# Altium PCB TX_Board.PcbDoc (part 1 of 5)
Units mm, origin at the board's own origin, x right, y up, seen from the top; angles counter-clockwise.
Board outline 69 x 69 mm, 4 copper layers (Top Layer, Int1 (GND), Int2 (GND), Bottom Layer), stack 1.591 mm thick; 102 components, 48 nets, 289 pads, 82 vias.
Unrouted connection lines stored in the file: 40.
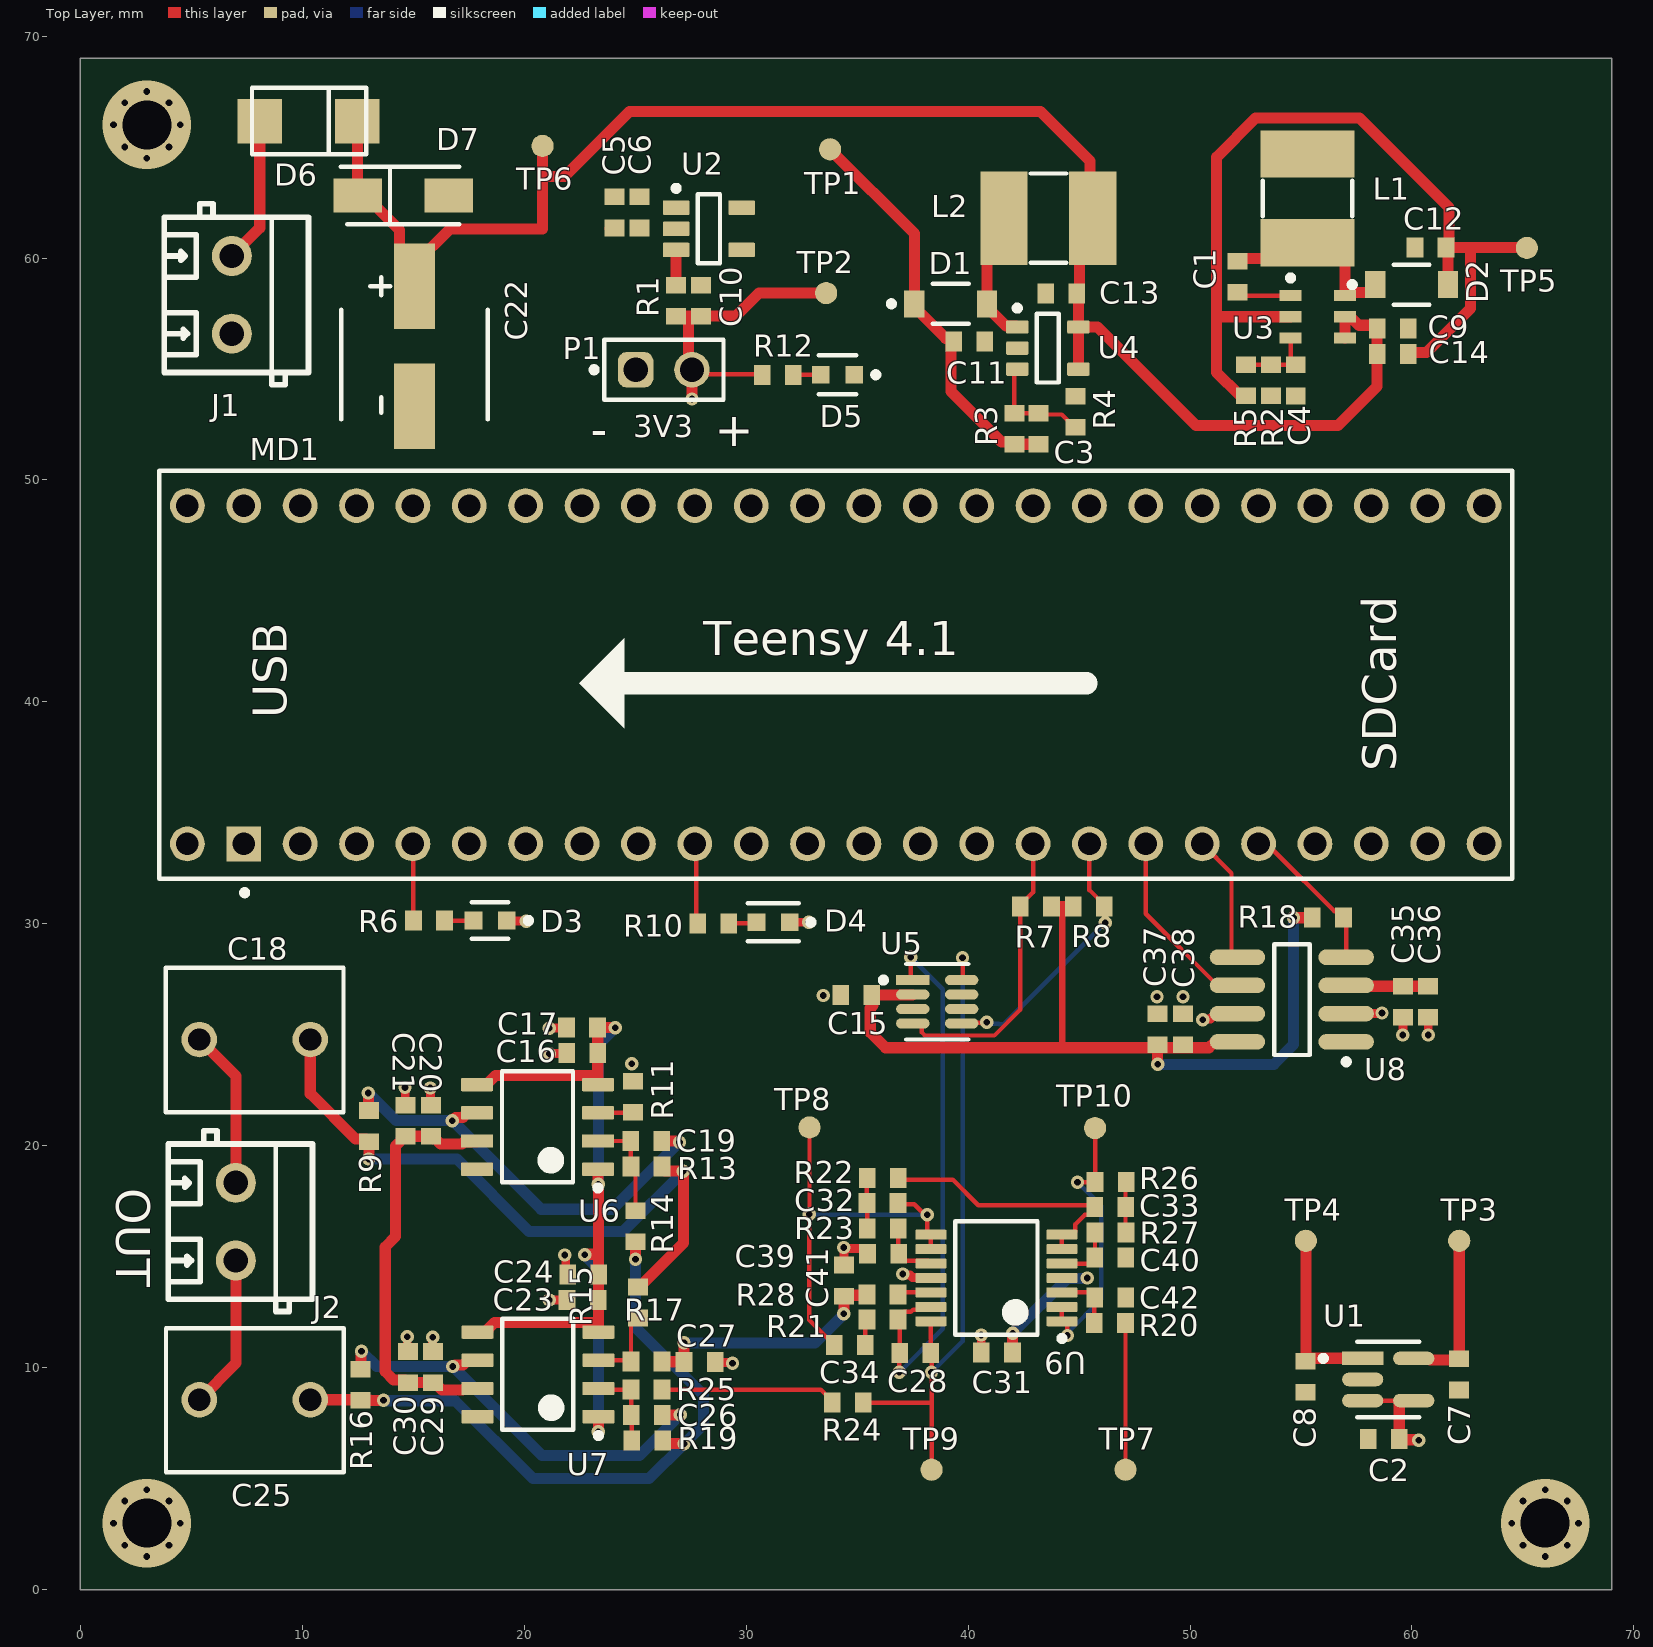
[diagram p0: Top Layer view]
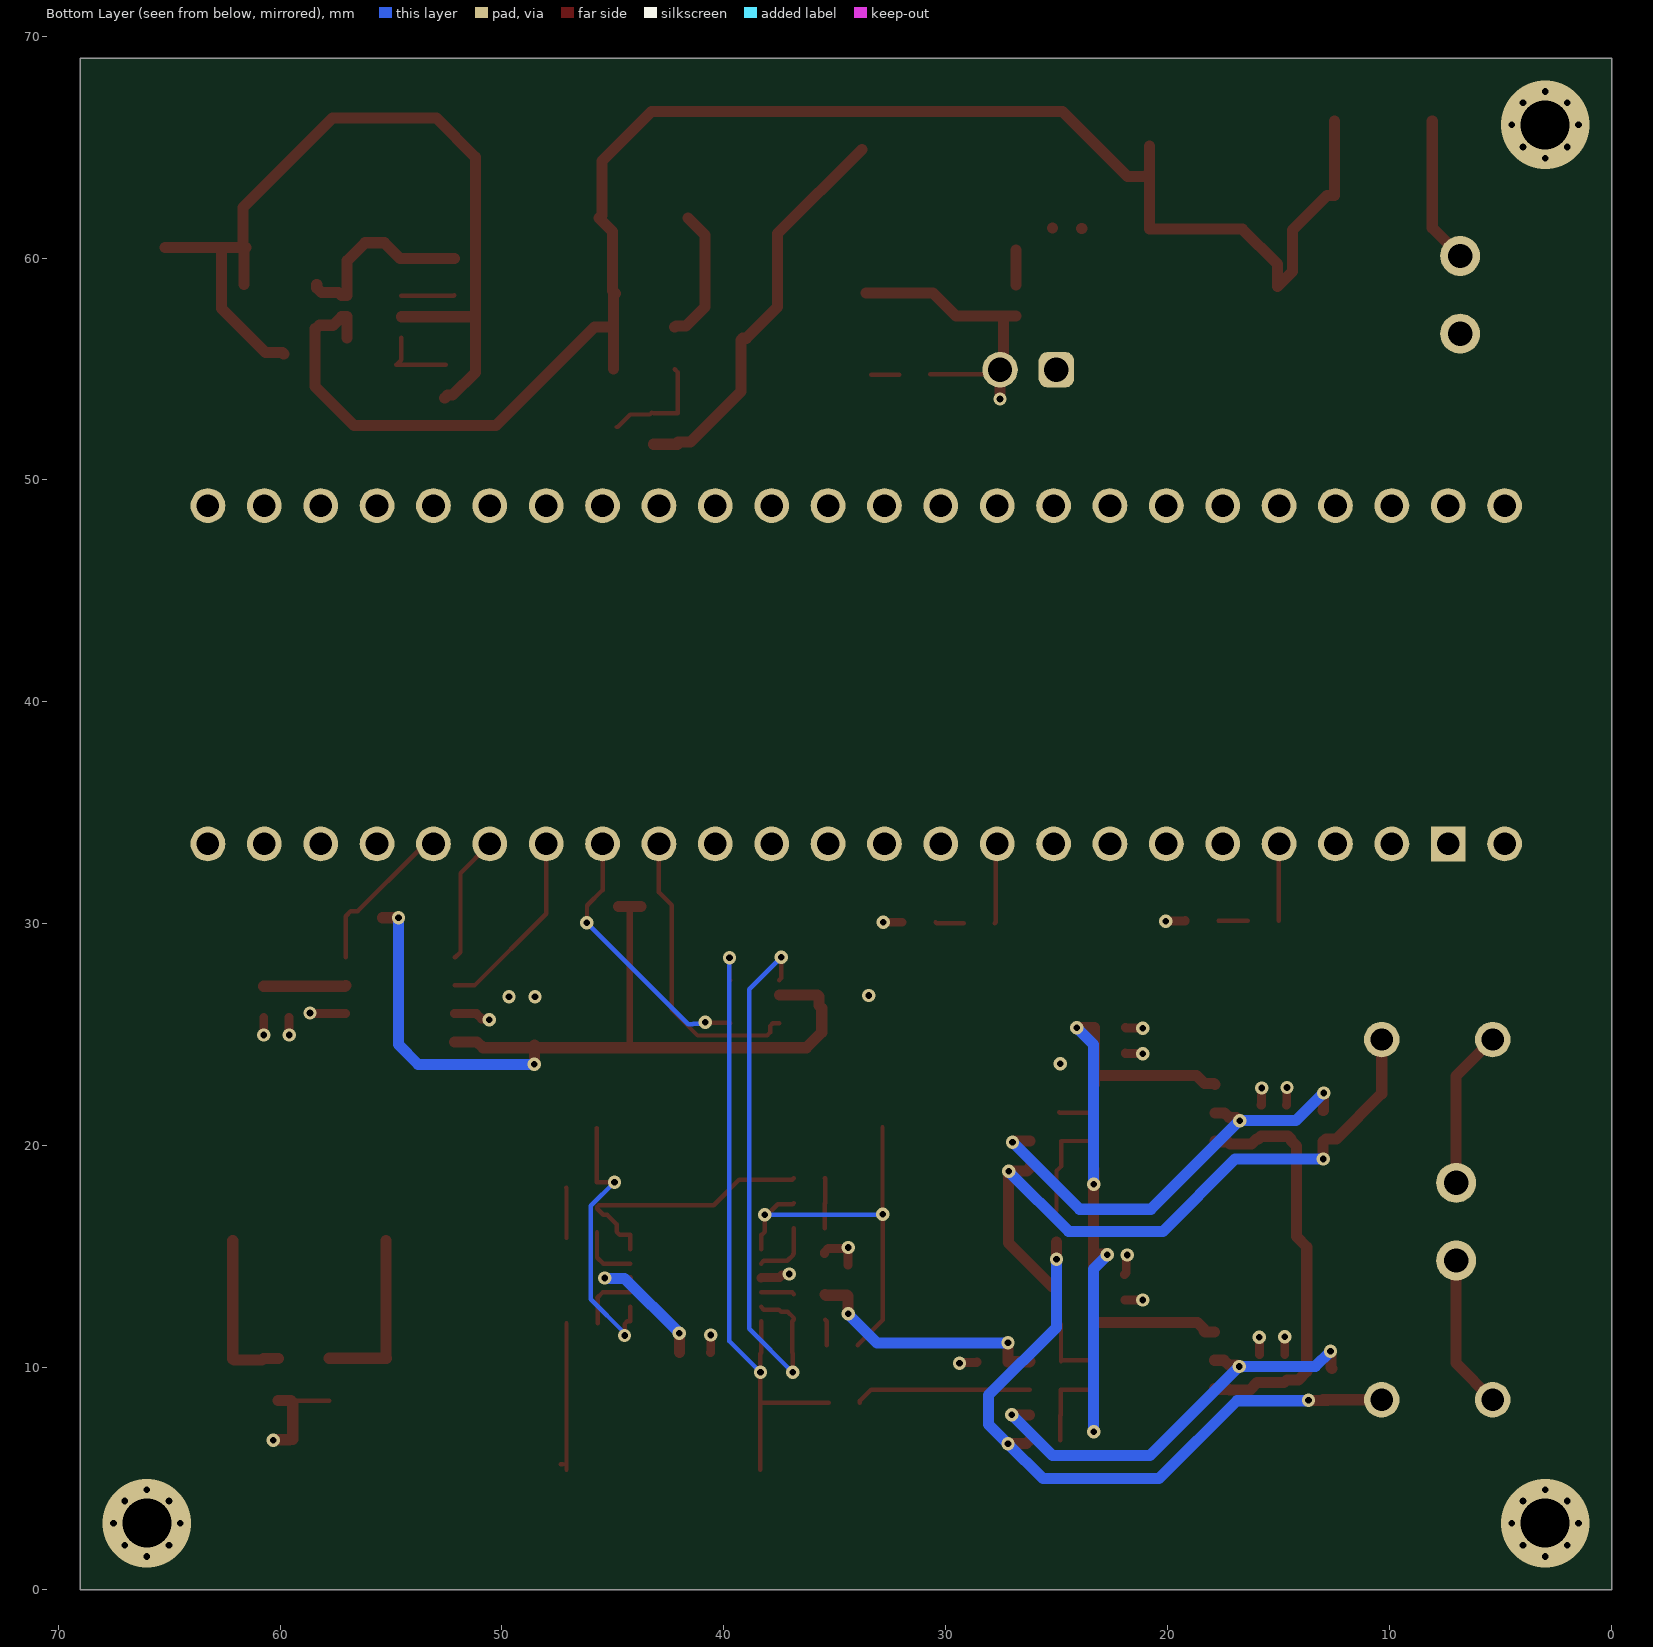
[diagram p1: Bottom Layer view, seen from below]
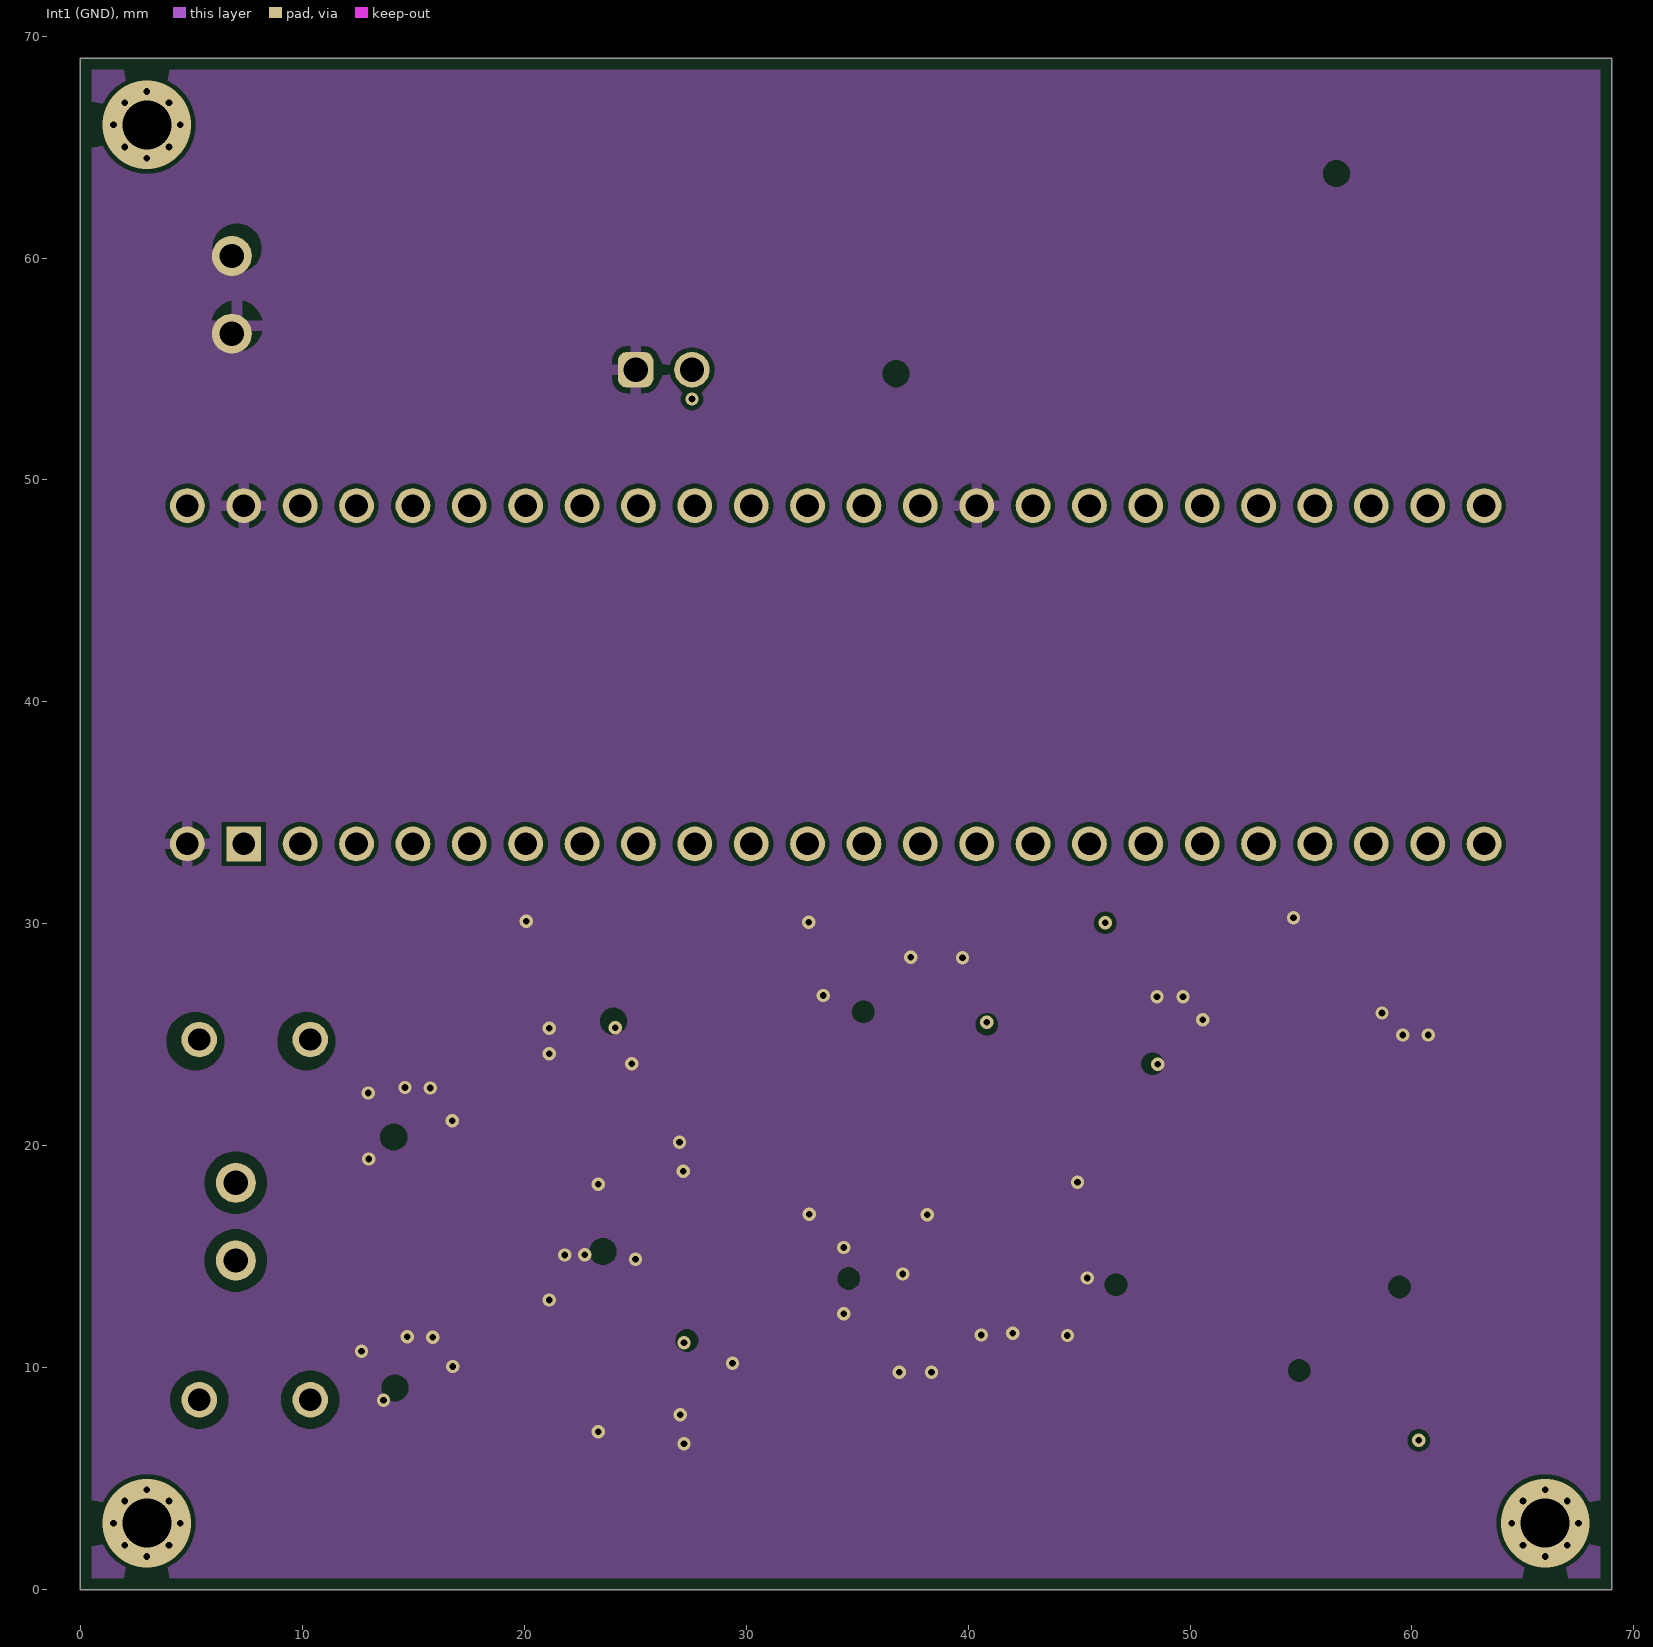
[diagram p2: Int1 (GND)]
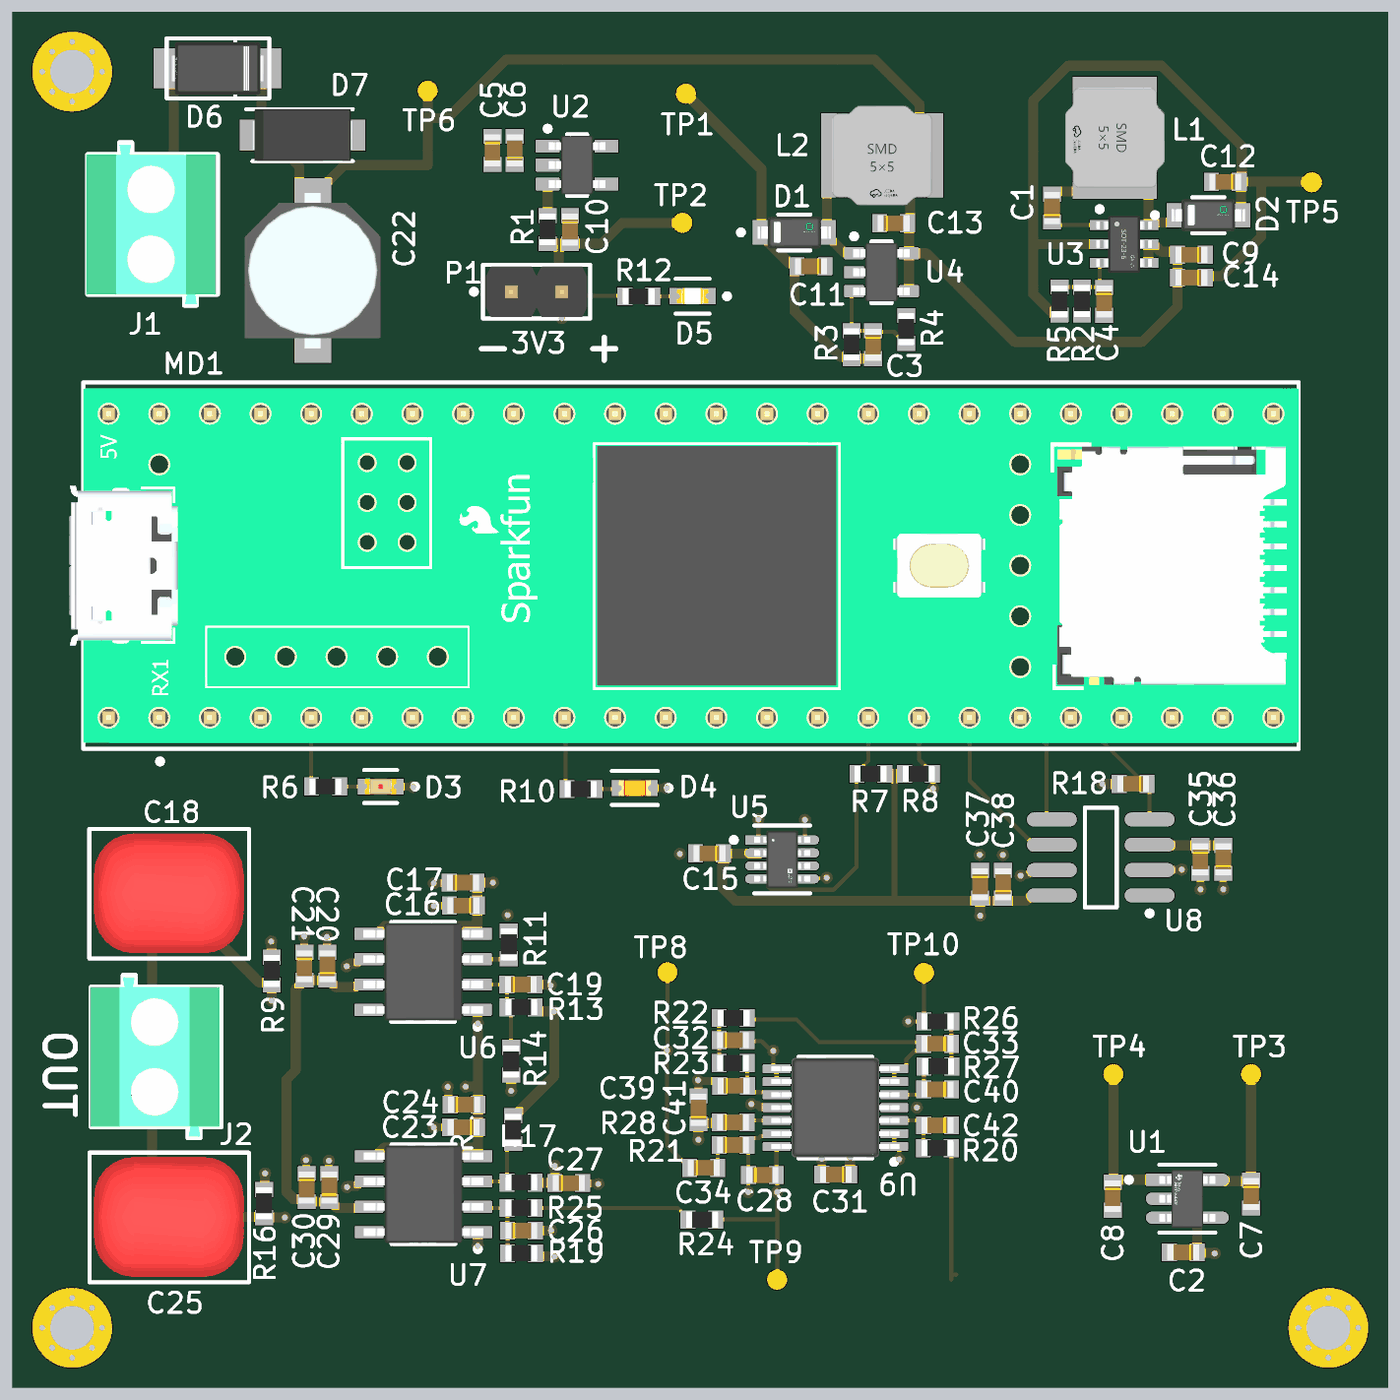
[diagram p3: 3D render of the assembled board from above, using the file's embedded part models]

## Layer stack, top to bottom
Top Solder: solder mask 0.0254, SM-001, Dk 4
Top Layer: signal copper 0.035
Dielectric 1: prepreg 0.2104, PP-017, Dk 4.4
Int1 (GND): signal copper 0.0175
Dielectric 3: core 1.065, Core-039, Dk 4.6
Int2 (GND): signal copper 0.0175
Dielectric 5: prepreg 0.2104, PP-017, Dk 4.4
Bottom Layer: signal copper 0.035
Bottom Solder: solder mask 0.0254, SM-001, Dk 4

## Board outline
0,0 0,69 69,69 69,0

## Design rules (kind name [scope] priority, off if disabled: settings)
BoardOutlineClearance [All] p1: gap=0.5 ignorepadtopadclearanceinfootprint=FALSE
Clearance Clearance_HYD [InNetClass('HYD')] p1: gap=0.5 ignorepadtopadclearanceinfootprint=FALSE
Clearance Clearance_HV [InNetClass('HV')] p2: gap=0.3 ignorepadtopadclearanceinfootprint=FALSE
Clearance Clearance_PWR_MAIN [InNetClass('PWR_MAIN')] p3: gap=0.2 ignorepadtopadclearanceinfootprint=FALSE
Clearance Clearance_PWR_LV [InNetClass('PWR_LV')] p4: gap=0.2 ignorepadtopadclearanceinfootprint=FALSE
Clearance [All] p5: gap=0.2 ignorepadtopadclearanceinfootprint=FALSE
MinimumSolderMaskSliver [All] p1: minsoldermaskwidth=0.1
PolygonConnect [All] p1: thpad.connectstyle=Relief thpad.reliefconductorwidth=0.5 thpad.reliefentries=4 thpad.polygonreliefangle="90 Angle" thpad.airgapwidth=0.254 smdpad.connectstyle=Direct smdpad.reliefconductorwidth=0.254 smdpad.reliefentries=4 smdpad.polygonreliefangle="90 Angle" smdpad.airgapwidth=0.254 via.connectstyle=Direct via.reliefconductorwidth=0.254 via.reliefentries=4 via.polygonreliefangle="90 Angle" via.airgapwidth=0.254
RoutingVias [All] p1: holewidth=0.3 width=0.6 viastyle="Through Hole" minholewidth=0.3 minwidth=0.6 maxholewidth=0.3 maxwidth=0.6
SilkToSilkClearance [All] p1: silktosilkclearance=0.15
SolderMaskExpansion SolderMaskExpansion_Vias [IsVia] p1: expansion=0.102 istentingtop=TRUE
SolderMaskExpansion SolderMaskExpansion_THT [IsPad And IsThruPin] p2: expansion=0.1 istentingtop=FALSE
SolderMaskExpansion [All] p3: expansion=0.05 istentingtop=FALSE
SupplyNets "Schematic Supply Nets_4" [InNet('VDD')] p1: voltage=0.000
SupplyNets "Schematic Supply Nets_3" [InNet('VSS')] p2: voltage=0.000
SupplyNets "Schematic Supply Nets_2" [InNet('VIN')] p3: voltage=0.000
SupplyNets "Schematic Supply Nets_1" [InNet('+3V3')] p4: voltage=0.000
SupplyNets "Schematic Supply Nets" [InNet('GND')] p5: voltage=0.000
Width Width_HYD [InNetClass('HYD')] p1: maxlimit=0.8 minlimit=0.5 preferedwidth=0.5
Width Width_GND [InNet('GND')] p2: maxlimit=0.8 minlimit=0.4 preferedwidth=0.5
Width Width_HV [InNetClass('HV')] p3: maxlimit=0.5 minlimit=0.5 preferedwidth=0.5
Width Width_PWR_MAIN [InNetClass('PWR_MAIN')] p4: maxlimit=0.8 minlimit=0.5 preferedwidth=0.5
Width Width_PWR_LV [InNetClass('PWR_LV')] p5: maxlimit=0.5 minlimit=0.5 preferedwidth=0.5
Width [All] p6: maxlimit=0.2 minlimit=0.15 preferedwidth=0.2
28 further rules are at their usual default settings.

## Classes and differential pairs
net class HYD: AMP_A AMP_A_OUT AMP_B AMP_B_OUT HYD_N HYD_P
net class PWR_LV: 3V3_LDO +3V3 REF_1V5 REF_3V
net class PWR_MAIN: VIN VIN_Supply
net class HV: Boost_SW IBuck_SW VDD VSS

## Components (designator, comment, footprint, x,y, rotation, side; value= is the part's Value field where it differs from the comment)
C1 "100nF" CAP_0603 52.146,59.157 r90 top
C2 "100nF" CAP_0603 58.727,6.782 r180 top
C3 "150pF" CAP_0603 43.169,52.31 r270 top
C4 "150pF" CAP_0603 54.762,54.483 r270 top
C5 "10uF" CAP_0603 24.079,62.052 r270 top value=10µF
C6 "100nF" CAP_0603 25.197,62.052 r90 top
C7 "100nF" CAP_0603 62.128,9.703 r270 top
C8 "100nF" CAP_0603 55.194,9.601 r270 top
C9 "4.7µF" CAP_0603 59.131,56.82 r180 top
C10 "1µF" CAP_0603 27.965,58.079 r270 top
C11 "10uF 35V" CAP_0603 40.056,56.236 r180 top value=10µF
C12 "10uF 35V" CAP_0603 60.833,60.477 r180 top value=10µF
C13 "4.7µF" CAP_0603 44.196,58.395 r0 top
C14 "10uF 50V" CAP_0603 59.131,55.677 r180 top value=10µF
C15 "100nF" CAP_0603 34.963,26.797 r180 top
C16 "100nF" CAP_0603 22.617,24.181 r180 top
C17 "10uF 35V" CAP_0603 22.606,25.324 r0 top value=10µF
C18 "1uF Film" PE105J2A0502 10.363,24.79 r180 top value=1uF
C19 "10pF" CAP_0603 25.502,20.218 r0 top
C20 "100nF" CAP_0603 15.799,21.133 r90 top
C21 "10uF 35V" CAP_0603 14.656,21.133 r270 top value=10µF
C22 "100uF 25V" CAPAE660X800N 15.062,56.025 r270 top value=100uF
C23 "100nF" CAP_0603 22.631,13.056 r180 top
C24 "10uF 35V" CAP_0603 22.657,14.199 r0 top value=10µF
C25 "1uF Film" PE105J2A0502 10.365,8.56 r180 top value=1uF
C26 "4.7pF" CAP_0603 25.527,7.874 r0 top
C27 "100nF" CAP_0603 27.903,10.262 r0 top
C28 "10pF" CAP_0603 37.617,10.668 r0 top
C29 "100nF" CAP_0603 15.9,10.033 r90 top
C30 "10uF 35V" CAP_0603 14.757,10.033 r270 top value=10µF
C31 "100nF" CAP_0603 41.3,10.693 r180 top
C32 "470pF" CAP_0603 36.144,17.424 r0 top
C33 "470pF" CAP_0603 46.406,17.247 r180 top
C34 "10nF" CAP_0603 34.671,11.024 r0 top
C35 "100nF" CAP_0603 59.588,26.492 r270 top
C36 "4.7µF" CAP_0603 60.731,26.492 r90 top
C37 "10uF" CAP_0603 48.539,25.248 r270 top value=10µF
C38 "100nF" CAP_0603 49.684,25.248 r90 top
C39 "47pF" CAP_0603 36.17,15.138 r0 top
C40 "47pF" CAP_0603 46.406,14.961 r180 top
C41 "100nF" CAP_0603 34.417,13.93 r90 top
C42 "47pF" CAP_0603 46.406,13.157 r180 top
D1 "MBR0540" FP-425-04-MFG 39.218,57.937 r0 top
D2 "MBR0540" FP-425-04-MFG 59.982,58.801 r0 top
D3 "LTST-C190KRKT" FP-LTST-C190KRKT-MFG 18.468,30.15 r180 top
D4 "LTST-C190KFKT" FP-LTST-C190KFKT-MFG 31.218,30.074 r180 top
D5 "LTST-C190KGKT" FP-LTST-C190KGKT-MFG 34.117,54.74 r180 top
D6 "SS34" SS34 10.287,66.167 r0 top
D7 "SMAJ15A" DIOM5026X229N 14.554,62.814 r0 top
J1 "DB301V-3.5-2P-GN-S" DB301V-3.5-2P-GN-S 6.833,60.091 r270 top
J2 "DB301V-3.5-2P-GN-S" DB301V-3.5-2P-GN-S 7.012,18.334 r270 top
L1 "22µH" SWPA5040S100MT 55.296,62.687 r90 top
L2 "10µH" SWPA5040S100MT 43.618,61.798 r180 top
MD1 "DEV-16996" FP-DEV-16996-MFG 34.038,41.224 r0 top locked
P1 "61300211121" 61300211121 26.291,54.966 r0 top
R1 "0Ω" RES_0603 26.846,58.093 r270 top
R2 "309K" RES_0603 53.645,54.502 r270 top value=309kΩ
R3 "205K" RES_0603 42.088,52.324 r270 top value=205kΩ
R4 "12K" RES_0603 44.831,53.086 r270 top value=12kΩ
R5 "11K" RES_0603 52.527,54.483 r90 top value=11kΩ
R6 "1kΩ" RES_0603 15.699,30.15 r0 top
R7 "4.7kΩ" RES_0603 43.044,30.785 r0 top
R8 "4.7kΩ" RES_0603 45.457,30.785 r180 top
R9 "0Ω" RES_0603 13.005,20.904 r270 top
R10 "1kΩ" RES_0603 28.501,30.023 r0 top
R11 "15kΩ" RES_0603 24.892,22.225 r270 top
R12 "1kΩ" RES_0603 31.407,54.737 r0 top
R13 "33kΩ" RES_0603 25.527,19.075 r180 top
R14 "33kΩ" RES_0603 25.019,16.358 r90 top
R15 "68kΩ" RES_0603 25.121,12.929 r90 top
R16 "0Ω" RES_0603 12.624,9.246 r270 top
R17 "2.49kΩ" RES_0603 25.527,10.287 r180 top
R18 "10kΩ" CAP_0603 56.212,30.277 r180 top
R19 "68kΩ" RES_0603 25.527,6.731 r0 top
R20 "0Ω" RES_0603 46.406,12.016 r180 top
R21 "10kΩ" CAP_0603 36.144,12.167 r0 top
R22 "1.2kΩ" RES_0603 36.169,18.544 r180 top
R23 "15kΩ" RES_0603 36.144,16.281 r0 top
R24 "0Ω" RES_0603 34.595,8.433 r180 top
R25 "2.49kΩ" RES_0603 25.527,9.017 r180 top
R26 "820R" RES_0603 46.406,18.364 r0 top value=820Ω
R27 "27kΩ" RES_0603 46.431,16.104 r180 top
R28 "10kΩ" CAP_0603 36.144,13.31 r0 top
TP1 "Test Point" "Test Point"#1 33.782,64.897 r90 top
TP2 "Test Point" "Test Point"#1 33.604,58.42 r270 top
TP3 "Test Point" "Test Point"#1 62.128,15.723 r90 top
TP4 "Test Point" "Test Point"#1 55.22,15.723 r90 top
TP5 "Test Point" "Test Point"#1 65.176,60.452 r90 top
TP6 "Test Point" "Test Point"#1 20.828,65.049 r90 top
TP7 "Test Point" "Test Point"#2 247.092,2.512 r90 top
TP8 "Test Point" "Test Point"#1 32.856,20.828 r270 top
TP9 "Test Point" "Test Point"#1 38.354,5.41 r90 top
TP10 "Test Point" "Test Point"#1 45.72,20.803 r270 top
U1 "REF2030AIDDCR" FP-DDC0005A-IPC_A 58.93,9.474 r0 top
U2 "TLV70433DBVR" DBV0005A_M 28.323,61.316 r0 top
U3 "LMR16006" LMR16006YDDCR 55.755,57.353 r0 top
U4 "LMR64010XMFX/NOPB" DBV0005A_N 43.592,55.941 r0 top
U5 "AD5245BRJZ10-RL7" FP-RJ-8-IPC_B 38.61,26.492 r0 top
U6 "OPA551UA/2K5" D0008A_N 20.601,20.853 r180 top
U7 "OPA552UA/2K5" D0008A_N 20.619,9.703 r180 top
U8 "DAC8830ICDR" TI-D8_M 54.586,26.591 r180 top
U9 "OPA4322AIPWR" PW0014A_N 41.277,14.046 r180 top

## Footprints (in the part's own frame and the unit in brackets; to place one, negate y for a bottom-side part, rotate by r counter-clockwise, add the part's x,y. Pads: shape width x height; smd on the part's side, far side on the other; paste and mask are expansions set on the pad)
61300211121 [mm] "Pin Header, pitch 2.54 mm, THT, Vertical, single row, 2p"
  rrect50% 1.6x1.6 hole 1.1: 1(-1.27,0)
  round 1.6 hole 1.1: 2(1.27,0)
  silkscreen extent -3.26,-1.35 2.69,1.35, body extent -2.54,-1.27 2.54,1.27, height 8.57
CAP_0603 [mm]
  rect 0.75x0.9 smd: 1(-0.7,0) 2(0.7,0)
  body extent -0.8,-0.4 0.8,0.4, height 0.9
CAPAE660X800N [mm]
  rect 3.85x1.85 smd: 1(-2.7,0) 2(2.7,0)
  silkscreen extent -3.1,-3.3 3.3,3.3, body extent -3.9,-3.4 3.9,3.4, height 8
D0008A_N [mm] "SOIC, 8-Leads, Body 5x4mm, Pitch 1.27mm, IPC Medium Density"
  rrect17% 1.45x0.6 smd: 1(-2.725,1.905) 2(-2.725,0.635) 3(-2.725,-0.635) 4(-2.725,-1.905) 5(2.725,-1.905) 6(2.725,-0.635) 7(2.725,0.635) 8(2.725,1.905)
  silkscreen extent -2.85,-2.5 1.6,2.88, body extent -3,-2.45 3,2.45, height 1.63
DB301V-3.5-2P-GN-S [mm]
  round 1.8 hole 1.1: 1(0,0) 2(3.5,0)
  silkscreen extent -2.35,-3.05 5.8,3.45, body extent -2.25,-3.13 5.75,3.38, height 8.5
DBV0005A_M [mm] "SOT23, 5-Leads, Body 3.05x1.75mm, Pitch 0.95mm, IPC Low Density"
  rrect15% 1.2x0.65 smd: 1(-1.475,0.95) 2(-1.475,0) 3(-1.475,-0.95) 4(1.475,-0.95) 5(1.475,0.95)
  silkscreen extent -1.6,-1.55 0.5,1.95, body extent -1.42,-1.46 1.42,1.46, height 1.08
DBV0005A_N [mm] "SOT23, 5-Leads, Body 3.05x1.75mm, Pitch 0.95mm, IPC Medium Density"
  rrect17% 1x0.6 smd: 1(-1.375,0.95) 2(-1.375,0) 3(-1.375,-0.95) 4(1.375,-0.95) 5(1.375,0.95)
  silkscreen extent -1.5,-1.55 0.5,1.92, body extent -1.42,-1.46 1.42,1.46, height 1.08
DIOM5026X229N [mm]
  rect 2.2x1.55 smd: 1(-2.05,0) 2(2.05,0)
  silkscreen extent -2.83,-1.3 2.52,1.3, body extent -2.52,-1.3 2.52,1.3, height 2.29
FP-425-04-MFG [mil]
  rect 36x48 smd paste+0: 1(-64.5,0) 2(64.5,0)
  silkscreen extent -110,-35 32,35, body extent -86,-39 86,39, height 10
FP-DDC0005A-IPC_A [mm]
  rect 1.854x0.612 smd paste+0: 1(-1.15,0.95)
  rrect100% 1.854x0.612 smd paste+0: 2(-1.15,0) 3(-1.15,-0.95) 4(1.15,-0.95) 5(1.15,0.95)
  silkscreen extent -3.05,-1.7 1.4,1.7, body extent -2.58,-1.95 2.58,1.95, height 0.25
FP-DEV-16996-MFG [mm]
  rect 1.57x1.57 hole 1.02 paste-2539.97: 0(-26.67,-7.62)
  round 1.57 hole 1.02 paste-2539.97: 1(-24.13,-7.62) 2(-21.59,-7.62) 3(-19.05,-7.62) 4(-16.51,-7.62) 5(-13.97,-7.62) 6(-11.43,-7.62) 7(-8.89,-7.62) 8(-6.35,-7.62) 9(-3.81,-7.62) 10(-1.27,-7.62) 11(1.27,-7.62) 12(3.81,-7.62) 13(3.81,7.62) 14(1.27,7.62) 15(-1.27,7.62) 16(-3.81,7.62) 17(-6.35,7.62) 18(-8.89,7.62) 19(-11.43,7.62) 20(-13.97,7.62) 21(-16.51,7.62) 22(-19.05,7.62) 23(-21.59,7.62) 24(8.89,-7.62) 25(11.43,-7.62) 26(13.97,-7.62) 27(16.51,-7.62) 28(19.05,-7.62) 29(21.59,-7.62) 30(24.13,-7.62) 31(26.67,-7.62) 32(29.21,-7.62) 33(29.21,7.62) 34(26.67,7.62) 35(24.13,7.62) 36(21.59,7.62) 37(19.05,7.62) 38(16.51,7.62) 39(13.97,7.62) 40(11.43,7.62) 41(8.89,7.62) 42(-29.21,7.62) 43(-26.67,7.62) 44(-24.13,7.62) 45(6.35,7.62) 46(-29.21,-7.62) 47(6.35,-7.62)
  silkscreen extent -30.48,-9.94 30.48,9.19, body extent -30.58,-9.29 30.58,9.29, height 0.25
FP-LTST-C190KFKT-MFG [mm]
  rect 0.8x0.8 smd paste+0: 1(-0.75,0) 2(0.75,0)
  silkscreen extent -1.83,-0.85 1.15,0.85, body extent -1.25,-0.55 1.25,0.55, height 0.25
FP-LTST-C190KGKT-MFG [mm]
  rect 0.8x0.8 smd paste+0: 1(-0.75,0) 2(0.75,0)
  silkscreen extent -1.85,-0.87 0.85,0.87, body extent -1.25,-0.55 1.25,0.55, height 0.25
FP-LTST-C190KRKT-MFG [mm]
  rect 0.8x0.8 smd paste+0: 1(-0.75,0) 2(0.75,0)
  silkscreen extent -1.86,-0.82 0.82,0.82, body extent -1.25,-0.55 1.25,0.55, height 0.25
FP-RJ-8-IPC_B [mm]
  rect 1.505x0.455 smd paste+0: 1(-1.1,0.975)
  rrect100% 1.505x0.455 smd paste+0: 2(-1.1,0.325) 3(-1.1,-0.325) 4(-1.1,-0.975) 5(1.1,-0.975) 6(1.1,-0.325) 7(1.1,0.325) 8(1.1,0.975)
  silkscreen extent -2.55,-1.7 1.4,1.7, body extent -2.1,-1.7 2.1,1.7, height 0.25
LMR16006YDDCR [mm] "SOT23, 6-Leads, Body 2.75x2.55mm, Pitch 0.95mm, IPC Medium Density"
  rect 1x0.5 smd: 1(-1.225,0.95) 2(-1.225,0) 3(-1.225,-0.95) 4(1.225,-0.95) 5(1.225,0) 6(1.225,0.95)
  silkscreen extent -1.35,1.63 -1.1,1.87, body extent -1.4,-1.44 1.4,1.44, height 1.64
PE105J2A0502 [mm]
  round 1.6 hole 1: 1(0,0) 2(5,0)
  silkscreen extent -1.5,-3.23 6.5,3.27, body extent -1.24,-3 6.26,3, height 11
PW0014A_N [mm] "SOP, 14-Leads, Body 5.1x4.5mm, Pitch 0.65mm, IPC Medium Density"
  rrect22% 1.4x0.45 smd: 1(-2.95,1.95) 2(-2.95,1.3) 3(-2.95,0.65) 4(-2.95,0) 5(-2.95,-0.65) 6(-2.95,-1.3) 7(-2.95,-1.95) 8(2.95,-1.95) 9(2.95,-1.3) 10(2.95,-0.65) 11(2.95,0) 12(2.95,0.65) 13(2.95,1.3) 14(2.95,1.95)
  silkscreen extent -3.08,-2.55 1.85,2.85, body extent -3.21,-2.5 3.21,2.5, height 1
RES_0603 [mm]
  rect 0.75x0.9 smd: 1(-0.686,0.002) 2(0.714,0.002)
  body extent -0.8,-0.4 0.8,0.4, height 0.45
SS34 [mm]
  rect 2x2 smd: A(-2.2,0) K(2.2,0)
  silkscreen extent -2.55,-1.5 2.6,1.5, body extent -2.34,-1.3 2.36,1.3, height 2
SWPA5040S100MT [mm] "Chip Inductor, 2-Leads, Body 5.00x5.00mm, IPC Medium Density"
  rect 2.124x4.22 smd: 1(-2,0) 2(2,0)
  silkscreen extent -0.8,-2.01 0.8,2.01, body extent -2.51,-2.5 2.51,2.5, height 2.13
"Test Point"#1 [mm]
  round 1 smd paste-2539.97: 1(0,0)
"Test Point"#2 [mm]
  round 1 smd paste-2539.97: 1(2.898,200)
TI-D8_M [mm] "SOIC, 8-Leads, Body 4.9x3.9mm, Pitch 1.27mm, IPC Low Density"
  oval 2.5x0.7 smd: 1(-2.45,1.905) 2(-2.45,0.635) 3(-2.45,-0.635) 4(-2.45,-1.905) 5(2.45,-1.905) 6(2.45,-0.635) 7(2.45,0.635) 8(2.45,1.905)
  silkscreen extent -2.58,-2.5 0.8,2.93, body extent -2,-2.5 2,2.5, height 1.75

## Part data
C1 C2 C6 C7 C8 C15 C16 C20 C23 C27 C29 C31 C35 C38 C41: library part CC0603KRX7R9BB104, "Multilayer Ceramic Capacitor, CC Series, 0.1 - F, - 10%, X7R, 50 V, 0603 [1608 Metric]", Case Code (Imperial)=0603, Case Code (Metric)=1608, Dielectric=X7R, Dielectric Material=Ceramic, JLCPCB Part Number=C14663, Manufacturer="Yageo Group", Max Operating Temperature=125°C, Min Operating Temperature=-55°C, Tolerance=10%, Voltage=50V, Case/Package=0603, Category="Ceramic Capacitors", China RoHS=Compliant, ComponentLink1Description=https://datasheet.octopart.com:443/CC0603KRX7R9BB104-Yageo-datasheet-177165144.pdf?src-supplier=IHS, ComponentLink1URL=https://datasheet.octopart.com:443/CC0603KRX7R9BB104-Yageo-datasheet-177165144.pdf?src-supplier=IHS, ComponentLink2Description=https://datasheet.octopart.com:443/CC0603KRX7R9BB104-Yageo-datasheet-82288757.pdf?src-supplier=Upverter, ComponentLink2URL=https://datasheet.octopart.com:443/CC0603KRX7R9BB104-Yageo-datasheet-82288757.pdf?src-supplier=Upverter, ComponentLink3Description=https://datasheet.octopart.com:443/CC0603KRX7R9BB104-Yageo-datasheet-68298032.pdf?src-supplier=Upverter, ComponentLink3URL=https://datasheet.octopart.com:443/CC0603KRX7R9BB104-Yageo-datasheet-68298032.pdf?src-supplier=Upverter, ComponentLink4Description=https://datasheet.octopart.com:443/CC0603KRX7R9BB104-Yageo-Group-datasheet-189192896.pdf?src-supplier=Future+Electronics, ComponentLink4URL=https://datasheet.octopart.com:443/CC0603KRX7R9BB104-Yageo-Group-datasheet-189192896.pdf?src-supplier=Future+Electronics, ComponentLink5Description=https://datasheet.octopart.com:443/CC0603KRX7R9BB104-Yageo-datasheet-12526321.pdf?src-supplier=Future+Electronics, ComponentLink5URL=https://datasheet.octopart.com:443/CC0603KRX7R9BB104-Yageo-datasheet-12526321.pdf?src-supplier=Future+Electronics, ComponentLink6Description=https://datasheet.octopart.com:443/CC0603KRX7R9BB104-Yageo-datasheet-166511530.pdf?src-supplier=Future+Electronics, ComponentLink6URL=https://datasheet.octopart.com:443/CC0603KRX7R9BB104-Yageo-datasheet-166511530.pdf?src-supplier=Future+Electronics, ComponentLink7Description=https://datasheet.octopart.com:443/CC0603KRX7R9BB104-Yageo-datasheet-137700082.pdf?src-supplier=Future+Electronics, ComponentLink7URL=https://datasheet.octopart.com:443/CC0603KRX7R9BB104-Yageo-datasheet-137700082.pdf?src-supplier=Future+Electronics, ComponentLink8Description=https://datasheet.octopart.com:443/CC0603KRX7R9BB104-Yageo-datasheet-137700084.pdf?src-supplier=Future+Electronics, ComponentLink8URL=https://datasheet.octopart.com:443/CC0603KRX7R9BB104-Yageo-datasheet-137700084.pdf?src-supplier=Future+Electronics, ComponentLink9Description=https://datasheet.octopart.com:443/CC0603KRX7R9BB104-Yageo-datasheet-27626582.pdf?src-supplier=Future+Electronics, ComponentLink9URL=https://datasheet.octopart.com:443/CC0603KRX7R9BB104-Yageo-datasheet-27626582.pdf?src-supplier=Future+Electronics, ComponentLink10Description=https://datasheet.octopart.com:443/CC0603KRX7R9BB104-Yageo-datasheet-15895757.pdf?src-supplier=Future+Electronics, ComponentLink10URL=https://datasheet.octopart.com:443/CC0603KRX7R9BB104-Yageo-datasheet-15895757.pdf?src-supplier=Future+Electronics, ComponentLink11Description=https://datasheet.octopart.com:443/CC0603KRX7R9BB104-Yageo-datasheet-8324192.pdf?src-supplier=Future+Electronics, ComponentLink11URL=https://datasheet.octopart.com:443/CC0603KRX7R9BB104-Yageo-datasheet-8324192.pdf?src-supplier=Future+Electronics, ComponentLink12Description=https://datasheet.octopart.com/CC0603KRX7R9BB104-Yageo-datasheet-10883670.pdf, ComponentLink12URL=https://datasheet.octopart.com/CC0603KRX7R9BB104-Yageo-datasheet-10883670.pdf, ComponentLink13Description=https://datasheet.octopart.com:443/CC0603KRX7R9BB104-Yageo-datasheet-181968726.pdf?src-supplier=Newark, ComponentLink13URL=https://datasheet.octopart.com:443/CC0603KRX7R9BB104-Yageo-datasheet-181968726.pdf?src-supplier=Newark, ComponentLink14Description=https://datasheet.octopart.com:443/CC0603KRX7R9BB104-Yageo-datasheet-499490.pdf?src-supplier=Newark, ComponentLink14URL=https://datasheet.octopart.com:443/CC0603KRX7R9BB104-Yageo-datasheet-499490.pdf?src-supplier=Newark, ComponentLink15Description=https://datasheet.octopart.com:443/CC0603KRX7R9BB104-Yageo-datasheet-62336348.pdf?src-supplier=Newark, ComponentLink15URL=https://datasheet.octopart.com:443/CC0603KRX7R9BB104-Yageo-datasheet-62336348.pdf?src-supplier=Newark, ComponentLink16Description=https://datasheet.octopart.com:443/CC0603KRX7R9BB104-Yageo-datasheet-147453679.pdf?src-supplier=Newark, ComponentLink16URL=https://datasheet.octopart.com:443/CC0603KRX7R9BB104-Yageo-datasheet-147453679.pdf?src-supplier=Newark, ComponentLink17Description=https://datasheet.octopart.com:443/CC0603KRX7R9BB104-Yageo-datasheet-151948686.pdf?src-supplier=Farnell, ComponentLink17URL=https://datasheet.octopart.com:443/CC0603KRX7R9BB104-Yageo-datasheet-151948686.pdf?src-supplier=Farnell, ComponentLink18Description=https://datasheet.octopart.com:443/CC0603KRX7R9BB104-Yageo-datasheet-500777.pdf?src-supplier=Farnell, ComponentLink18URL=https://datasheet.octopart.com:443/CC0603KRX7R9BB104-Yageo-datasheet-500777.pdf?src-supplier=Farnell, ComponentLink19Description=https://datasheet.octopart.com:443/CC0603KRX7R9BB104-Yageo-datasheet-178019014.pdf?src-supplier=Burklin+Elektronik, ComponentLink19URL=https://datasheet.octopart.com:443/CC0603KRX7R9BB104-Yageo-datasheet-178019014.pdf?src-supplier=Burklin+Elektronik, ComponentLink20Description=https://datasheet.octopart.com:443/CC0603KRX7R9BB104-Yageo-Group-datasheet-165992755.pdf?src-supplier=ODG+(Origin+Data+Global), ComponentLink20URL=https://datasheet.octopart.com:443/CC0603KRX7R9BB104-Yageo-Group-datasheet-165992755.pdf?src-supplier=ODG+(Origin+Data+Global), ComponentLink21Description=https://datasheet.octopart.com:443/CC0603KRX7R9BB104-Yageo-datasheet-140260305.pdf?src-supplier=SOS+electronic, ComponentLink21URL=https://datasheet.octopart.com:443/CC0603KRX7R9BB104-Yageo-datasheet-140260305.pdf?src-supplier=SOS+electronic, ComponentLink22Description=https://datasheet.octopart.com:443/CC0603KRX7R9BB104-Yageo-datasheet-120101875.pdf?src-supplier=Megastar, ComponentLink22URL=https://datasheet.octopart.com:443/CC0603KRX7R9BB104-Yageo-datasheet-120101875.pdf?src-supplier=Megastar, ComponentLink23Description=https://datasheet.octopart.com:443/CC0603KRX7R9BB104-Yageo-datasheet-8701427.pdf?src-supplier=element14, ComponentLink23URL=https://datasheet.octopart.com:443/CC0603KRX7R9BB104-Yageo-datasheet-8701427.pdf?src-supplier=element14, ComponentLink24Description=https://datasheet.octopart.com:443/CC0603KRX7R9BB104-Yageo-datasheet-5301394.pdf?src-supplier=element14, ComponentLink24URL=https://datasheet.octopart.com:443/CC0603KRX7R9BB104-Yageo-datasheet-5301394.pdf?src-supplier=element14, ComponentLink25Description=https://datasheet.octopart.com:443/CC0603KRX7R9BB104-Yageo-datasheet-17600895.pdf?src-supplier=TME, ComponentLink25URL=https://datasheet.octopart.com:443/CC0603KRX7R9BB104-Yageo-datasheet-17600895.pdf?src-supplier=TME, ComponentLink26Description=http://sigma.octopart.com:80/15889575/rohs_statement/Yageo-CC0603KRX7R9BB104.pdf?src-supplier=Compliance+Statements, ComponentLink26URL=http://sigma.octopart.com:80/15889575/rohs_statement/Yageo-CC0603KRX7R9BB104.pdf?src-supplier=Compliance+Statements, ComponentLink27Description=http://sigma.octopart.com:80/conflict_mineral_statement/Yageo-company-3.pdf?src-supplier=Compliance+Statements, ComponentLink27URL=http://sigma.octopart.com:80/conflict_mineral_statement/Yageo-company-3.pdf?src-supplier=Compliance+Statements, Country of Origin="Mainland China, Taiwan", Depth=800µm, Export Control Classification Number (ECCN) Code=EAR99, Halogen Free="Halogen Free", Harmonized Tariff Schedule (HTS) Code=8532.24.00.20, Height=800µm, Introduction Date=2005-08-18, Lead Free="Lead Free", Length=1.6mm, Lifecycle Status=Production, Manufacturer Part Number=CC0603KRX7R9BB104, Material=Ceramic, Mounting Technology="Surface Mount", Number of Terminals=2, Pins=2, Pricing="4000=0.00582, 8000=0.00559, 16000=0.00541, 32000=0.00522, 64000=0.00504 (USD)", Radiation Hardening=No, REACH SVHC=Yes, RoHS=Compliant, Schedule B="8532240020, 8532240020|8532240020, 8532240020|8532240020|8532240020, 8532240020|8532240020|8532240020|8532240020", Stock=6088000, Supplier=Avnet, Supplier Part Number=CC0603KRX7R9BB104, Termination=SMD/SMT, Thickness=889µm, Voltage Rating=50V, Voltage Rating (DC)=50V, Width=800µm
C3 C4: library part CC0603JRNPO9BN151, "Surface Mount Ceramic Multilayer Capacitor 150pF 5% C0G 50V 0603 Paper T/R", Case Code (Imperial)=0603, Case Code (Metric)=1608, Dielectric=C0G, Dielectric Material=Ceramic, Insulation Resistance=100GΩ, JLCPCB Part Number=C107038, Manufacturer="Yageo Group", Max Operating Temperature=125°C, Min Operating Temperature=-55°C, Temperature Coefficient=30ppm/°C, Tolerance=5%, Voltage=50V, Case/Package=0603, Category="Ceramic Capacitors", China RoHS=Compliant, ComponentLink1Description=https://datasheet.octopart.com:443/CC0603JRNPO9BN151-Yageo-datasheet-182140217.pdf?src-supplier=IHS, ComponentLink1URL=https://datasheet.octopart.com:443/CC0603JRNPO9BN151-Yageo-datasheet-182140217.pdf?src-supplier=IHS, ComponentLink2Description=https://datasheet.octopart.com:443/CC0603JRNPO9BN151-Yageo-datasheet-10406438.pdf?src-supplier=element14+APAC, ComponentLink2URL=https://datasheet.octopart.com:443/CC0603JRNPO9BN151-Yageo-datasheet-10406438.pdf?src-supplier=element14+APAC, ComponentLink3Description=https://datasheet.octopart.com:443/CC0603JRNPO9BN151-Yageo-datasheet-65873193.pdf?src-supplier=element14+APAC, ComponentLink3URL=https://datasheet.octopart.com:443/CC0603JRNPO9BN151-Yageo-datasheet-65873193.pdf?src-supplier=element14+APAC, ComponentLink4Description=https://datasheet.octopart.com:443/CC0603JRNPO9BN151-Yageo-datasheet-10882999.pdf?src-supplier=element14+APAC, ComponentLink4URL=https://datasheet.octopart.com:443/CC0603JRNPO9BN151-Yageo-datasheet-10882999.pdf?src-supplier=element14+APAC, ComponentLink5Description=https://datasheet.octopart.com:443/CC0603JRNPO9BN151-Yageo-datasheet-5321569.pdf?src-supplier=Newark, ComponentLink5URL=https://datasheet.octopart.com:443/CC0603JRNPO9BN151-Yageo-datasheet-5321569.pdf?src-supplier=Newark, ComponentLink6Description=https://datasheet.octopart.com:443/CC0603JRNPO9BN151-Yageo-datasheet-181968183.pdf?src-supplier=Newark, ComponentLink6URL=https://datasheet.octopart.com:443/CC0603JRNPO9BN151-Yageo-datasheet-181968183.pdf?src-supplier=Newark, ComponentLink7Description=https://datasheet.octopart.com:443/CC0603JRNPO9BN151-Yageo-datasheet-181968182.pdf?src-supplier=Newark, ComponentLink7URL=https://datasheet.octopart.com:443/CC0603JRNPO9BN151-Yageo-datasheet-181968182.pdf?src-supplier=Newark, ComponentLink8Description=https://datasheet.octopart.com:443/CC0603JRNPO9BN151-Yageo-datasheet-151948684.pdf?src-supplier=Newark, ComponentLink8URL=https://datasheet.octopart.com:443/CC0603JRNPO9BN151-Yageo-datasheet-151948684.pdf?src-supplier=Newark, ComponentLink9Description=https://datasheet.octopart.com:443/CC0603JRNPO9BN151-Yageo-datasheet-67645495.pdf?src-supplier=Newark, ComponentLink9URL=https://datasheet.octopart.com:443/CC0603JRNPO9BN151-Yageo-datasheet-67645495.pdf?src-supplier=Newark, ComponentLink10Description=https://datasheet.octopart.com:443/CC0603JRNPO9BN151-Yageo-datasheet-137875056.pdf?src-supplier=Future+Electronics, ComponentLink10URL=https://datasheet.octopart.com:443/CC0603JRNPO9BN151-Yageo-datasheet-137875056.pdf?src-supplier=Future+Electronics, ComponentLink11Description=https://datasheet.octopart.com:443/CC0603JRNPO9BN151-Yageo-datasheet-136957424.pdf?src-supplier=Future+Electronics, ComponentLink11URL=https://datasheet.octopart.com:443/CC0603JRNPO9BN151-Yageo-datasheet-136957424.pdf?src-supplier=Future+Electronics, ComponentLink12Description=https://datasheet.octopart.com:443/CC0603JRNPO9BN151-Yageo-datasheet-137700082.pdf?src-supplier=Future+Electronics, ComponentLink12URL=https://datasheet.octopart.com:443/CC0603JRNPO9BN151-Yageo-datasheet-137700082.pdf?src-supplier=Future+Electronics, ComponentLink13Description=https://datasheet.octopart.com:443/CC0603JRNPO9BN151-Yageo-datasheet-78855684.pdf?src-supplier=Future+Electronics, ComponentLink13URL=https://datasheet.octopart.com:443/CC0603JRNPO9BN151-Yageo-datasheet-78855684.pdf?src-supplier=Future+Electronics, ComponentLink14Description=https://datasheet.octopart.com:443/CC0603JRNPO9BN151-Yageo-datasheet-62091628.pdf?src-supplier=Future+Electronics, ComponentLink14URL=https://datasheet.octopart.com:443/CC0603JRNPO9BN151-Yageo-datasheet-62091628.pdf?src-supplier=Future+Electronics, ComponentLink15Description=https://datasheet.octopart.com:443/CC0603JRNPO9BN151-Yageo-datasheet-24578986.pdf?src-supplier=Future+Electronics, ComponentLink15URL=https://datasheet.octopart.com:443/CC0603JRNPO9BN151-Yageo-datasheet-24578986.pdf?src-supplier=Future+Electronics, ComponentLink16Description=https://datasheet.octopart.com:443/CC0603JRNPO9BN151-Yageo-datasheet-16730043.pdf?src-supplier=Future+Electronics, ComponentLink16URL=https://datasheet.octopart.com:443/CC0603JRNPO9BN151-Yageo-datasheet-16730043.pdf?src-supplier=Future+Electronics, ComponentLink17Description=https://datasheet.octopart.com:443/CC0603JRNPO9BN151-Yageo-datasheet-15895757.pdf?src-supplier=Future+Electronics, ComponentLink17URL=https://datasheet.octopart.com:443/CC0603JRNPO9BN151-Yageo-datasheet-15895757.pdf?src-supplier=Future+Electronics, ComponentLink18Description=https://datasheet.octopart.com:443/CC0603JRNPO9BN151-Yageo-datasheet-12589826.pdf?src-supplier=Future+Electronics, ComponentLink18URL=https://datasheet.octopart.com:443/CC0603JRNPO9BN151-Yageo-datasheet-12589826.pdf?src-supplier=Future+Electronics, ComponentLink19Description=https://datasheet.octopart.com:443/CC0603JRNPO9BN151-Yageo-datasheet-8817079.pdf?src-supplier=element14, ComponentLink19URL=https://datasheet.octopart.com:443/CC0603JRNPO9BN151-Yageo-datasheet-8817079.pdf?src-supplier=element14, ComponentLink20Description=https://datasheet.octopart.com:443/CC0603JRNPO9BN151-Yageo-datasheet-8324240.pdf?src-supplier=element14, ComponentLink20URL=https://datasheet.octopart.com:443/CC0603JRNPO9BN151-Yageo-datasheet-8324240.pdf?src-supplier=element14, ComponentLink21Description=https://datasheet.octopart.com:443/CC0603JRNPO9BN151-Yageo-datasheet-504625.pdf?src-supplier=element14, ComponentLink21URL=https://datasheet.octopart.com:443/CC0603JRNPO9BN151-Yageo-datasheet-504625.pdf?src-supplier=element14, ComponentLink22Description=https://datasheet.octopart.com:443/CC0603JRNPO9BN151-Yageo-Group-datasheet-188129580.pdf?src-supplier=LCSC, ComponentLink22URL=https://datasheet.octopart.com:443/CC0603JRNPO9BN151-Yageo-Group-datasheet-188129580.pdf?src-supplier=LCSC, ComponentLink23Description=https://datasheet.octopart.com:443/CC0603JRNPO9BN151-Yageo-datasheet-10621397.pdf?src-supplier=Farnell, ComponentLink23URL=https://datasheet.octopart.com:443/CC0603JRNPO9BN151-Yageo-datasheet-10621397.pdf?src-supplier=Farnell, ComponentLink24Description=https://datasheet.octopart.com:443/CC0603JRNPO9BN151-Yageo-datasheet-8643175.pdf?src-supplier=SOS+electronic, ComponentLink24URL=https://datasheet.octopart.com:443/CC0603JRNPO9BN151-Yageo-datasheet-8643175.pdf?src-supplier=SOS+electronic, ComponentLink25Description=https://datasheet.octopart.com:443/CC0603JRNPO9BN151-Yageo-datasheet-68296204.pdf?src-supplier=Megastar, ComponentLink25URL=https://datasheet.octopart.com:443/CC0603JRNPO9BN151-Yageo-datasheet-68296204.pdf?src-supplier=Megastar, ComponentLink26Description=http://sigma.octopart.com:80/conflict_mineral_statement/Yageo-company-3.pdf?src-supplier=Compliance+Statements, ComponentLink26URL=http://sigma.octopart.com:80/conflict_mineral_statement/Yageo-company-3.pdf?src-supplier=Compliance+Statements, ComponentLink27Description=http://sigma.octopart.com:80/rohs_statement/Yageo-company-2.pdf?src-supplier=Compliance+Statements, ComponentLink27URL=http://sigma.octopart.com:80/rohs_statement/Yageo-company-2.pdf?src-supplier=Compliance+Statements, Composition=Ceramic, Country of Origin="Mainland China, Taiwan", Depth=800µm, Export Control Classification Number (ECCN) Code=EAR99, Halogen Free="Halogen Free", Harmonized Tariff Schedule (HTS) Code=8532.24.00.20, Height=800µm, Introduction Date=2005-07-07, Lead Free="Lead Free", Length=1.6mm, Lifecycle Status=Production, Manufacturer Part Number=CC0603JRNPO9BN151, Material=Ceramic, Mounting Technology="Surface Mount", Number of Terminals=2, Pins=2, Pricing="4000=0.00694 (USD)", Radiation Hardening=No, REACH SVHC=Unaffected, RoHS=Compliant, Stock=168000, Supplier=Avnet, Supplier Part Number=CC0603JRNPO9BN151, Termination=SMD/SMT, Thickness=889µm, Voltage Rating=50V, Voltage Rating (AC)=50V, Voltage Rating (DC)=50V, Width=800µm
C5 C37: library part CL10A106MA8NRNC, "25V 10uF X5R ±20% 0603 Multilayer Ceramic Capacitors MLCC - SMD/SMT ROHS", Case Code (Imperial)=0603, Case Code (Metric)=1608, Dielectric=X5R, Dielectric Material=Ceramic, JLCPCB Part Number=C96446, Manufacturer="Samsung Electro-Mechanics", Max Operating Temperature=85°C, Min Operating Temperature=-55°C, Tolerance=20%, Voltage Rating=25V, Case/Package=0603, Category="Ceramic Capacitors", China RoHS=Compliant, ComponentLink1Description=https://datasheet.octopart.com:443/CL10A106MA8NRNC-Samsung-Electro-Mechanics-datasheet-182019172.pdf?src-supplier=IHS, ComponentLink1URL=https://datasheet.octopart.com:443/CL10A106MA8NRNC-Samsung-Electro-Mechanics-datasheet-182019172.pdf?src-supplier=IHS, ComponentLink2Description=https://datasheet.octopart.com:443/CL10A106MA8NRNC-Samsung-Electro-Mechanics-datasheet-137745063.pdf?src-supplier=Future+Electronics, ComponentLink2URL=https://datasheet.octopart.com:443/CL10A106MA8NRNC-Samsung-Electro-Mechanics-datasheet-137745063.pdf?src-supplier=Future+Electronics, ComponentLink3Description=https://datasheet.octopart.com:443/CL10A106MA8NRNC-Samsung-Electro-Mechanics-datasheet-136031756.pdf?src-supplier=Future+Electronics, ComponentLink3URL=https://datasheet.octopart.com:443/CL10A106MA8NRNC-Samsung-Electro-Mechanics-datasheet-136031756.pdf?src-supplier=Future+Electronics, ComponentLink4Description=https://datasheet.octopart.com:443/CL10A106MA8NRNC-Samsung-Electro-Mechanics-datasheet-110226291.pdf?src-supplier=Future+Electronics, ComponentLink4URL=https://datasheet.octopart.com:443/CL10A106MA8NRNC-Samsung-Electro-Mechanics-datasheet-110226291.pdf?src-supplier=Future+Electronics, ComponentLink5Description=https://datasheet.octopart.com:443/CL10A106MA8NRNC-Samsung-Electro-Mechanics-datasheet-87580073.pdf?src-supplier=Future+Electronics, ComponentLink5URL=https://datasheet.octopart.com:443/CL10A106MA8NRNC-Samsung-Electro-Mechanics-datasheet-87580073.pdf?src-supplier=Future+Electronics, ComponentLink6Description=https://datasheet.octopart.com:443/CL10A106MA8NRNC-Samsung-Electro-Mechanics-datasheet-68300265.pdf?src-supplier=Future+Electronics, ComponentLink6URL=https://datasheet.octopart.com:443/CL10A106MA8NRNC-Samsung-Electro-Mechanics-datasheet-68300265.pdf?src-supplier=Future+Electronics, ComponentLink7Description=https://datasheet.octopart.com:443/CL10A106MA8NRNC-Samsung-datasheet-66660282.pdf?src-supplier=Future+Electronics, ComponentLink7URL=https://datasheet.octopart.com:443/CL10A106MA8NRNC-Samsung-datasheet-66660282.pdf?src-supplier=Future+Electronics, ComponentLink8Description=https://datasheet.octopart.com:443/CL10A106MA8NRNC-Samsung-datasheet-48647236.pdf?src-supplier=Future+Electronics, ComponentLink8URL=https://datasheet.octopart.com:443/CL10A106MA8NRNC-Samsung-datasheet-48647236.pdf?src-supplier=Future+Electronics, ComponentLink9Description=https://datasheet.octopart.com:443/CL10A106MA8NRNC-Samsung-datasheet-39118733.pdf?src-supplier=Future+Electronics, ComponentLink9URL=https://datasheet.octopart.com:443/CL10A106MA8NRNC-Samsung-datasheet-39118733.pdf?src-supplier=Future+Electronics, ComponentLink10Description=https://datasheet.octopart.com:443/CL10A106MA8NRNC-Samsung-Electro-Mechanics-datasheet-149156483.pdf?src-supplier=Future+Electronics, ComponentLink10URL=https://datasheet.octopart.com:443/CL10A106MA8NRNC-Samsung-Electro-Mechanics-datasheet-149156483.pdf?src-supplier=Future+Electronics, Contact Plating=Tin, Country of Origin="Mainland China, Philippines, South Korea", Export Control Classification Number (ECCN) Code=EAR99, Harmonized Tariff Schedule (HTS) Code=8532.24.00.20, Height=800µm, Introduction Date=2013-01-16, Lead Free="Lead Free", Length=1.6mm, Lifecycle Status=Production, Manufacturer Part Number=CL10A106MA8NRNC, Material=Ceramic, Mounting Technology="Surface Mount", Number of Terminals=2, Packaging="Tape & Reel (TR)", Pricing="4000=0.03585, 8000=0.03513, 16000=0.03443, 32000=0.03377, 64000=0.03313 (USD)", REACH SVHC=Yes, RoHS=Compliant, Schedule B="8532240020, 8532240020|8532240020|8532240020|8532240020|8532240020|8532240020|8532240020|8532240020|8532240020|8532240020|8532240020, 8532240020|8532240020|8532240020|8532240020|8532240020|8532240020|8532240020|8532240020|8532240020|8532240020|8532240020|8532240020, 8532240020|8532240020|8532240020|8532240020|8532240020|8532240020|8532240020|8532240020|8532240020|8532240020|8532240020|8532240020|8532240020", Stock=6860000, Supplier=Avnet, Supplier Part Number=CL10A106MA8NRNC, Termination=Wraparound, Thickness=889µm, Voltage Rating (DC)=25V, Width=800µm
C9 C13 C36: library part CL10A475KA8NQNC, "25V 4.7uF X5R 卤10% 0603 Multilayer Ceramic Capacitors MLCC - SMD/SMT ROHS", Case Code (Imperial)=0603, Case Code (Metric)=1608, Dielectric=X5R, Dielectric Material=Ceramic, JLCPCB Part Number=C69335, Manufacturer="Samsung Electro-Mechanics", Max Operating Temperature=85°C, Min Operating Temperature=-55°C, Tolerance=10%, Voltage Rating=25V, Case/Package=0603, Category="Ceramic Capacitors", China RoHS=Compliant, ComponentLink1Description=https://datasheet.octopart.com:443/CL10A475KA8NQNC-Samsung-Electro-Mechanics-datasheet-182019420.pdf?src-supplier=IHS, ComponentLink1URL=https://datasheet.octopart.com:443/CL10A475KA8NQNC-Samsung-Electro-Mechanics-datasheet-182019420.pdf?src-supplier=IHS, ComponentLink2Description=https://datasheet.octopart.com:443/CL10A475KA8NQNC-Samsung-Electro-Mechanics-datasheet-136031786.pdf?src-supplier=Samsung+SCT, ComponentLink2URL=https://datasheet.octopart.com:443/CL10A475KA8NQNC-Samsung-Electro-Mechanics-datasheet-136031786.pdf?src-supplier=Samsung+SCT, ComponentLink3Description=https://datasheet.octopart.com:443/CL10A475KA8NQNC-Samsung-Electro-Mechanics-datasheet-133510619.pdf?src-supplier=Future+Electronics, ComponentLink3URL=https://datasheet.octopart.com:443/CL10A475KA8NQNC-Samsung-Electro-Mechanics-datasheet-133510619.pdf?src-supplier=Future+Electronics, ComponentLink4Description=https://datasheet.octopart.com:443/CL10A475KA8NQNC-Samsung-Electro-Mechanics-datasheet-68304637.pdf?src-supplier=Future+Electronics, ComponentLink4URL=https://datasheet.octopart.com:443/CL10A475KA8NQNC-Samsung-Electro-Mechanics-datasheet-68304637.pdf?src-supplier=Future+Electronics, ComponentLink5Description=https://datasheet.octopart.com:443/CL10A475KA8NQNC-Samsung-datasheet-66660282.pdf?src-supplier=Future+Electronics, ComponentLink5URL=https://datasheet.octopart.com:443/CL10A475KA8NQNC-Samsung-datasheet-66660282.pdf?src-supplier=Future+Electronics, ComponentLink6Description=https://datasheet.octopart.com:443/CL10A475KA8NQNC-Samsung-datasheet-42901174.pdf?src-supplier=Future+Electronics, ComponentLink6URL=https://datasheet.octopart.com:443/CL10A475KA8NQNC-Samsung-datasheet-42901174.pdf?src-supplier=Future+Electronics, ComponentLink7Description=https://datasheet.octopart.com:443/CL10A475KA8NQNC-Samsung-Electro-Mechanics-datasheet-100454038.pdf?src-supplier=Future+Electronics, ComponentLink7URL=https://datasheet.octopart.com:443/CL10A475KA8NQNC-Samsung-Electro-Mechanics-datasheet-100454038.pdf?src-supplier=Future+Electronics, ComponentLink8Description=https://datasheet.octopart.com:443/CL10A475KA8NQNC-Samsung-Electro-Mechanics-datasheet-149158805.pdf?src-supplier=Future+Electronics, ComponentLink8URL=https://datasheet.octopart.com:443/CL10A475KA8NQNC-Samsung-Electro-Mechanics-datasheet-149158805.pdf?src-supplier=Future+Electronics, Contact Plating=Tin, Country of Origin="Mainland China, Philippines, South Korea", Depth=800µm, Export Control Classification Number (ECCN) Code=EAR99, Harmonized Tariff Schedule (HTS) Code=8532.24.00.20, Height=950µm, Introduction Date=2010-04-05, Lead Free="Lead Free", Length=1.6mm, Lifecycle Status=Production, Manufacturer Part Number=CL10A475KA8NQNC, Material=Ceramic, Mounting Technology="Surface Mount", Number of Terminals=2, Packaging="Tape & Reel (TR)", Pricing="4000=0.365 (USD)", REACH SVHC=Unaffected, RoHS=Compliant, Schedule B="8532240020, 8532240020|8532240020, 8532240020|8532240020|8532240020, 8532240020|8532240020|8532240020|8532240020", Stock=708000, Supplier="Future Electronics", Supplier Part Number=CL10A475KA8NQNC, Termination=Wraparound, Thickness=889µm, Voltage Rating (DC)=25V, Width=800µm
C10: library part CL10B105KB8NQNC, "MLCC - 0603 50 V X7R 1 uF 10 % Multilayer Ceramic Capacitor", Case/Package=0603, Dielectric Material=Ceramic, JLCPCB Part Number=C5199872, Manufacturer="Samsung Electro-Mechanics", Max Operating Temperature=125°C, Min Operating Temperature=-55°C, Tolerance=10%, Voltage Rating (DC)=50V, Category="Ceramic Capacitors", China RoHS=Compliant, ComponentLink1Description=https://datasheet.octopart.com:443/CL10B105KB8NQNC-Samsung-Electro-Mechanics-datasheet-182019892.pdf?src-supplier=IHS, ComponentLink1URL=https://datasheet.octopart.com:443/CL10B105KB8NQNC-Samsung-Electro-Mechanics-datasheet-182019892.pdf?src-supplier=IHS, ComponentLink2Description=https://datasheet.octopart.com:443/CL10B105KB8NQNC-Samsung-datasheet-8326407.pdf?src-supplier=TME, ComponentLink2URL=https://datasheet.octopart.com:443/CL10B105KB8NQNC-Samsung-datasheet-8326407.pdf?src-supplier=TME, ComponentLink3Description=https://datasheet.octopart.com:443/CL10B105KB8NQNC-Samsung-Electro-Mechanics-datasheet-168551976.pdf?src-supplier=Future+Electronics, ComponentLink3URL=https://datasheet.octopart.com:443/CL10B105KB8NQNC-Samsung-Electro-Mechanics-datasheet-168551976.pdf?src-supplier=Future+Electronics, Height=800µm, Length=1.6mm, Lifecycle Status=Production, Manufacturer Part Number=CL10B105KB8NQNC, Mounting Technology="Surface Mount", Number of Terminals=2, Pricing="4000=0.0293, 8000=0.0289, 16000=0.0284, 20000=0.0283, 60000=0.0274 (USD)", REACH SVHC=Unaffected, RoHS=Compliant, Stock=52000, Supplier="Future Electronics", Supplier Part Number=CL10B105KB8NQNC, Width=800µm
C11 C12 C17 C21 C24 C30: library part GRM188R6YA106MA73D, "35V 10uF X5R ±20% 0603 Multilayer Ceramic Capacitors MLCC - SMD/SMT ROHS", Case Code (Imperial)=0603, Case Code (Metric)=1608, Dielectric=X5R, Dielectric Material=Ceramic, JLCPCB Part Number=C194427, Manufacturer=Murata, Manufacturer Lifecycle Status="IN PRODUCTION", Max Operating Temperature=85°C, Min Operating Temperature=-55°C, Tolerance=20%, Voltage Rating=35V, Case/Package=0603, Category="Ceramic Capacitors", ComponentLink1Description=https://datasheet.octopart.com:443/GRM188R6YA106MA73D-Murata-datasheet-149523261.pdf?src-supplier=Newark, ComponentLink1URL=https://datasheet.octopart.com:443/GRM188R6YA106MA73D-Murata-datasheet-149523261.pdf?src-supplier=Newark, ComponentLink2Description=https://datasheet.octopart.com:443/GRM188R6YA106MA73D-Murata-datasheet-165579666.pdf?src-supplier=TME, ComponentLink2URL=https://datasheet.octopart.com:443/GRM188R6YA106MA73D-Murata-datasheet-165579666.pdf?src-supplier=TME, ComponentLink3Description=https://datasheet.octopart.com:443/GRM188R6YA106MA73D-Murata-datasheet-141274968.pdf?src-supplier=Ciiva, ComponentLink3URL=https://datasheet.octopart.com:443/GRM188R6YA106MA73D-Murata-datasheet-141274968.pdf?src-supplier=Ciiva, ComponentLink4Description=https://datasheet.octopart.com:443/GRM188R6YA106MA73D-Murata-datasheet-140705172.pdf?src-supplier=Ciiva, ComponentLink4URL=https://datasheet.octopart.com:443/GRM188R6YA106MA73D-Murata-datasheet-140705172.pdf?src-supplier=Ciiva, ComponentLink5Description=https://datasheet.octopart.com:443/GRM188R6YA106MA73D-Murata-datasheet-138742920.pdf?src-supplier=Ciiva, ComponentLink5URL=https://datasheet.octopart.com:443/GRM188R6YA106MA73D-Murata-datasheet-138742920.pdf?src-supplier=Ciiva, ComponentLink6Description=https://datasheet.octopart.com:443/GRM188R6YA106MA73D-Murata-datasheet-86813743.pdf?src-supplier=Future+Electronics, ComponentLink6URL=https://datasheet.octopart.com:443/GRM188R6YA106MA73D-Murata-datasheet-86813743.pdf?src-supplier=Future+Electronics, ComponentLink7Description=https://datasheet.octopart.com/GRM188R6YA106MA73D-Murata-datasheet-12515295.pdf, ComponentLink7URL=https://datasheet.octopart.com/GRM188R6YA106MA73D-Murata-datasheet-12515295.pdf, ComponentLink8Description=https://datasheet.octopart.com/GRM188R6YA106MA73D-Murata-datasheet-12510076.pdf, ComponentLink8URL=https://datasheet.octopart.com/GRM188R6YA106MA73D-Murata-datasheet-12510076.pdf, ComponentLink9Description=https://datasheet.octopart.com/GRM188R6YA106MA73D-Murata-datasheet-11978611.pdf, ComponentLink9URL=https://datasheet.octopart.com/GRM188R6YA106MA73D-Murata-datasheet-11978611.pdf, ComponentLink10Description=https://datasheet.octopart.com/GRM188R6YA106MA73D-Murata-datasheet-10025737.pdf, ComponentLink10URL=https://datasheet.octopart.com/GRM188R6YA106MA73D-Murata-datasheet-10025737.pdf, ComponentLink11Description=https://datasheet.octopart.com/GRM188R6YA106MA73D-Murata-datasheet-8819587.pdf, ComponentLink11URL=https://datasheet.octopart.com/GRM188R6YA106MA73D-Murata-datasheet-8819587.pdf, ComponentLink12Description=http://sigma.octopart.com:80/reach_statement/Murata-company-16.pdf?src-supplier=Compliance+Statements, ComponentLink12URL=http://sigma.octopart.com:80/reach_statement/Murata-company-16.pdf?src-supplier=Compliance+Statements, Height=800µm, Length=1.6mm, Lifecycle Status=Production, Manufacturer Part Number=GRM188R6YA106MA73D, Material=Ceramic, Mounting Technology="Surface Mount", Number of Terminals=2, Pricing="4000=0.22 (USD)", REACH SVHC=Unaffected, RoHS=Compliant, Schedule B="8532240020, 8532240020|8532240020|8532240020|8532240020|8532240020|8532240020|8532240020|8532240020|8532240020|8532240020|8532240020|8532240020|8532240020|8532240020|8532240020|8532240020|8532240020|8532240020|8532240020|8532240020|8532240020|8532240020|8532240020|85", Stock=856000, Supplier="Future Electronics", Supplier Part Number=GRM188R6YA106MA73D, Thickness=800µm, Voltage Rating (DC)=35V, Width=800µm
C14: library part GRM21BR61H106KE43L, "50V 10uF X5R ±10% 0805 Multilayer Ceramic Capacitors MLCC - SMD/SMT ROHS", Case/Package=0805, Dielectric=X5R, Dielectric Material=Ceramic, JLCPCB Part Number=C440198, Manufacturer=Murata, Manufacturer Lifecycle Status="IN PRODUCTION", Max Operating Temperature=85°C, Min Operating Temperature=-55°C, Tolerance=10%, Voltage Rating=50V, Category="Ceramic Capacitors", ComponentLink1Description=https://datasheet.octopart.com:443/GRM21BR61H106KE43L-Murata-datasheet-155345082.pdf?src-supplier=Newark, ComponentLink1URL=https://datasheet.octopart.com:443/GRM21BR61H106KE43L-Murata-datasheet-155345082.pdf?src-supplier=Newark, ComponentLink2Description=https://datasheet.octopart.com:443/GRM21BR61H106KE43L-Murata-datasheet-141278272.pdf?src-supplier=Geoflip, ComponentLink2URL=https://datasheet.octopart.com:443/GRM21BR61H106KE43L-Murata-datasheet-141278272.pdf?src-supplier=Geoflip, ComponentLink3Description=https://datasheet.octopart.com:443/GRM21BR61H106KE43L-Murata-datasheet-165579666.pdf?src-supplier=TME, ComponentLink3URL=https://datasheet.octopart.com:443/GRM21BR61H106KE43L-Murata-datasheet-165579666.pdf?src-supplier=TME, ComponentLink4Description=https://datasheet.octopart.com:443/GRM21BR61H106KE43L-Murata-datasheet-140707579.pdf?src-supplier=Ciiva, ComponentLink4URL=https://datasheet.octopart.com:443/GRM21BR61H106KE43L-Murata-datasheet-140707579.pdf?src-supplier=Ciiva, ComponentLink5Description=https://datasheet.octopart.com:443/GRM21BR61H106KE43L-Murata-datasheet-138744880.pdf?src-supplier=Ciiva, ComponentLink5URL=https://datasheet.octopart.com:443/GRM21BR61H106KE43L-Murata-datasheet-138744880.pdf?src-supplier=Ciiva, ComponentLink6Description=https://datasheet.octopart.com/GRM21BR61H106KE43L-Murata-datasheet-12515295.pdf, ComponentLink6URL=https://datasheet.octopart.com/GRM21BR61H106KE43L-Murata-datasheet-12515295.pdf, ComponentLink7Description=https://datasheet.octopart.com/GRM21BR61H106KE43L-Murata-datasheet-12510076.pdf, ComponentLink7URL=https://datasheet.octopart.com/GRM21BR61H106KE43L-Murata-datasheet-12510076.pdf, ComponentLink8Description=https://datasheet.octopart.com/GRM21BR61H106KE43L-Murata-datasheet-11978611.pdf, ComponentLink8URL=https://datasheet.octopart.com/GRM21BR61H106KE43L-Murata-datasheet-11978611.pdf, ComponentLink9Description=https://datasheet.octopart.com/GRM21BR61H106KE43L-Murata-datasheet-10025737.pdf, ComponentLink9URL=https://datasheet.octopart.com/GRM21BR61H106KE43L-Murata-datasheet-10025737.pdf, ComponentLink10Description=https://datasheet.octopart.com/GRM21BR61H106KE43L-Murata-datasheet-8819587.pdf, ComponentLink10URL=https://datasheet.octopart.com/GRM21BR61H106KE43L-Murata-datasheet-8819587.pdf, ComponentLink11Description=http://sigma.octopart.com:80/reach_statement/Murata-company-16.pdf?src-supplier=Compliance+Statements, ComponentLink11URL=http://sigma.octopart.com:80/reach_statement/Murata-company-16.pdf?src-supplier=Compliance+Statements, Country of Origin="Japan, Mainland China, Philippines, Singapore, Thailand", Export Control Classification Number (ECCN) Code=EAR99, Harmonized Tariff Schedule (HTS) Code=8532.24.00.20, Height=1.25mm, Introduction Date=2018-09-13, Length=2mm, Lifecycle Status=Production, Manufacturer Part Number=GRM21BR61H106KE43L, Material=Ceramic, Mounting Technology="Surface Mount", Number of Terminals=2, Pricing="1=0.319, 6=0.103, 25=0.142, 51=0.0916, 100=0.127, 250=0.115, 251=0.0713, 500=0.102, 501=0.0676, 1000=0.094, 2500=0.088, 5000=0.081 (USD)", REACH SVHC=Unaffected, RoHS=Compliant, Supplier=Newark, Supplier Part Number=GRM21BR61H106KE43L, Thickness=1.25mm, Voltage Rating (DC)=50V, Width=1.25mm
C18 C25: library part PE105J2A0502, "-40℃~+110℃ 100V 1uF Metallized Polyester ±5% Plugin,P=5mm Film Capacitors ROHS", JLCPCB Part Number=C390070